# EAGLE board proj1 (EAGLE 4.15)
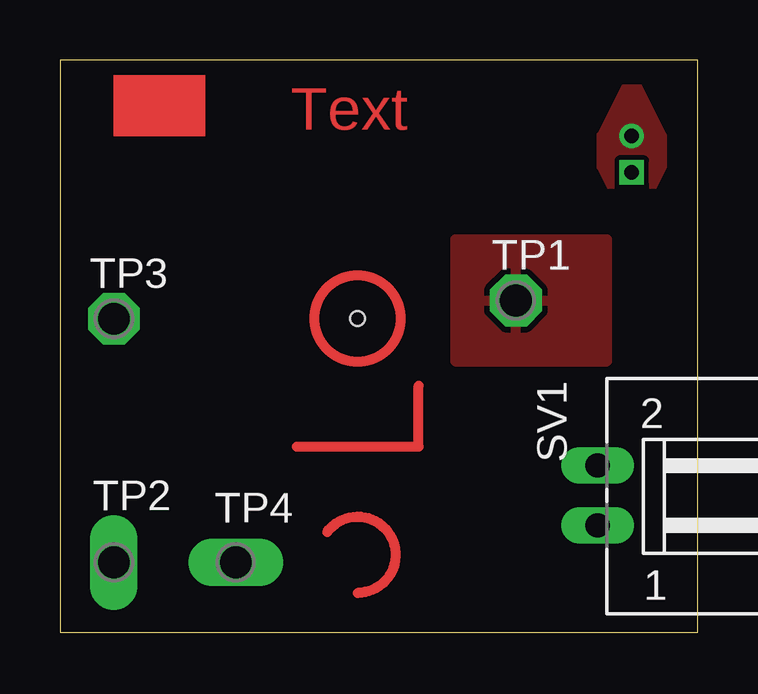
[diagram p0: board, top side]
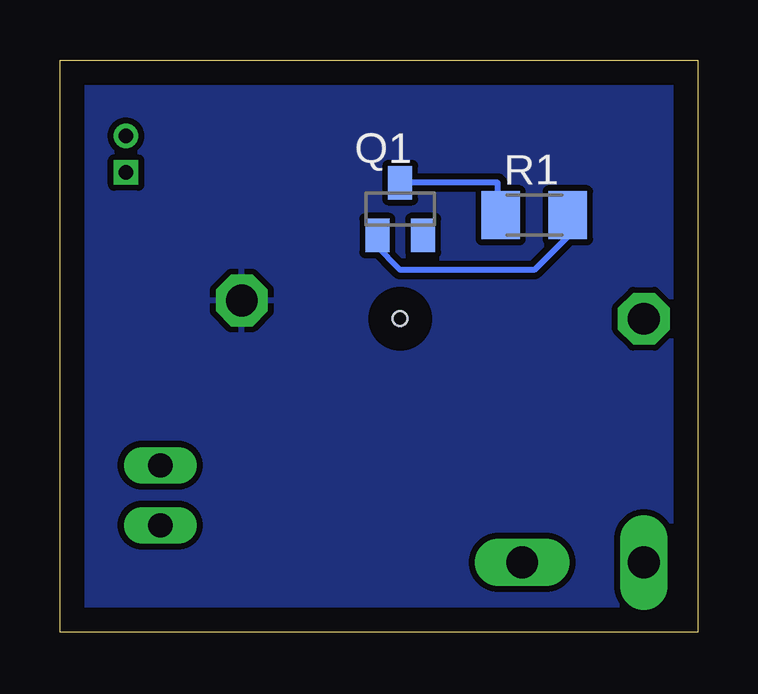
[diagram p1: board, bottom side, seen from below]

Size 26.59 x 23.87 mm. Coordinates in mm from the lower left corner, seen from the top.
Outline: 0,0 26.59,0 26.59,23.87 0,23.87 0,0
Copper layers (1*16): Top 0.035mm / dielectric 1.5mm / Bottom 0.035mm
Design rules "default": minimum track width 10mil, minimum drill 24mil, track to track 8mil, track to pad 8mil, pad to pad 8mil, via to via 8mil, smd to smd 8mil, copper to edge 40mil, drill to drill 8mil, minimum pad ring 10mil, minimum via ring 8mil, stop-mask expansion 4mil, vias tented up to drill 0mil, thermal gap 10mil
Holes 0.61 mm at 12.41,13.08

## Footprints (pad centres in the part's own frame; a part is rotated, then mirrored left to right if it is on the bottom)
SOT23 = smd 1 x 1.4: 1 -0.95,-1.1; 2 0.95,-1.1; 3 0,1.1
M1206 = smd 1.6 x 2: 1 -1.4,0; 2 1.4,0
L02P = drill 1.016 long: 1 1.25,-6.25; 2 -1.25,-6.25
P1-13 = drill 1.321 pad 2.159 octagon: 1 0,0
P1-13Y = drill 1.321 pad 1.905 long: 1 0,0

## Placement (x,y rotation side)
Q1  [SOT23]  12.41,17.65 0 bottom
R1  [M1206]  6.82,17.39 0 bottom
SV1  [L02P]  28.66,5.71 270 top
TP1  P1-13  [P1-13]  19.01,13.84 0 top
TP2  P1-13Y  [P1-13Y]  2.25,2.92 0 top
TP3  P1-13  [P1-13]  2.25,13.08 0 top
TP4  P1-13Y  [P1-13Y]  7.33,2.92 90 top

## Library data of the parts
Q1 = semicon-smd-ipc
R1 = rcl
SV1 = con-amp-mt
TP1-TP4 = testpad

## Nets
GND: TP1.1
N$4: Q1.3 R1.1
N$5: Q1.1 R1.2

## Tracks (layer width: path | path; a pad name or v marks a point on that pad's centre or on a via)
GND
  pour Bottom (isolate 0.254): 0.72,23.49 25.87,23.49 25.87,0.63 0.72,0.63
  pour Top: 16.47,16.38 16.47,11.3 22.82,11.3 22.82,16.38
N$1  (via drill 0.61)
  other vias: 23.84,20.7
  pour Top: 22.57,20.7 22.57,19.43 23.84,16.89 25.11,19.43 25.11,20.7 23.84,23.24
N$2
  Top 0.406: 9.87,7.74 14.95,7.74 14.95,10.28
N$3  (via drill 0.61)
  other vias: 23.84,19.17
N$4
  Bottom 0.254: R1.1 8.34,17.39 8.34,18.75 Q1.3
N$5
  Bottom 0.254: R1.2 5.42,16.51 6.82,15.11 12.41,15.11 13.42,16.12 13.36,16.19 Q1.1
S$1
  Top 0.406: 11.14,4.19 arc-233 12.41,1.65
(copper drawn outside any net)
  shapes: Top area x1, Top circle x1

## Text on the board
Top: Text